# Altium PCB PCB.PcbDoc
Units mm, origin at the board's own origin, x right, y up, seen from the top; angles counter-clockwise.
Board outline 65 x 52 mm, 2 copper layers (Top Layer, Bottom Layer); 12 components, 7 nets, 33 pads, 855 vias.
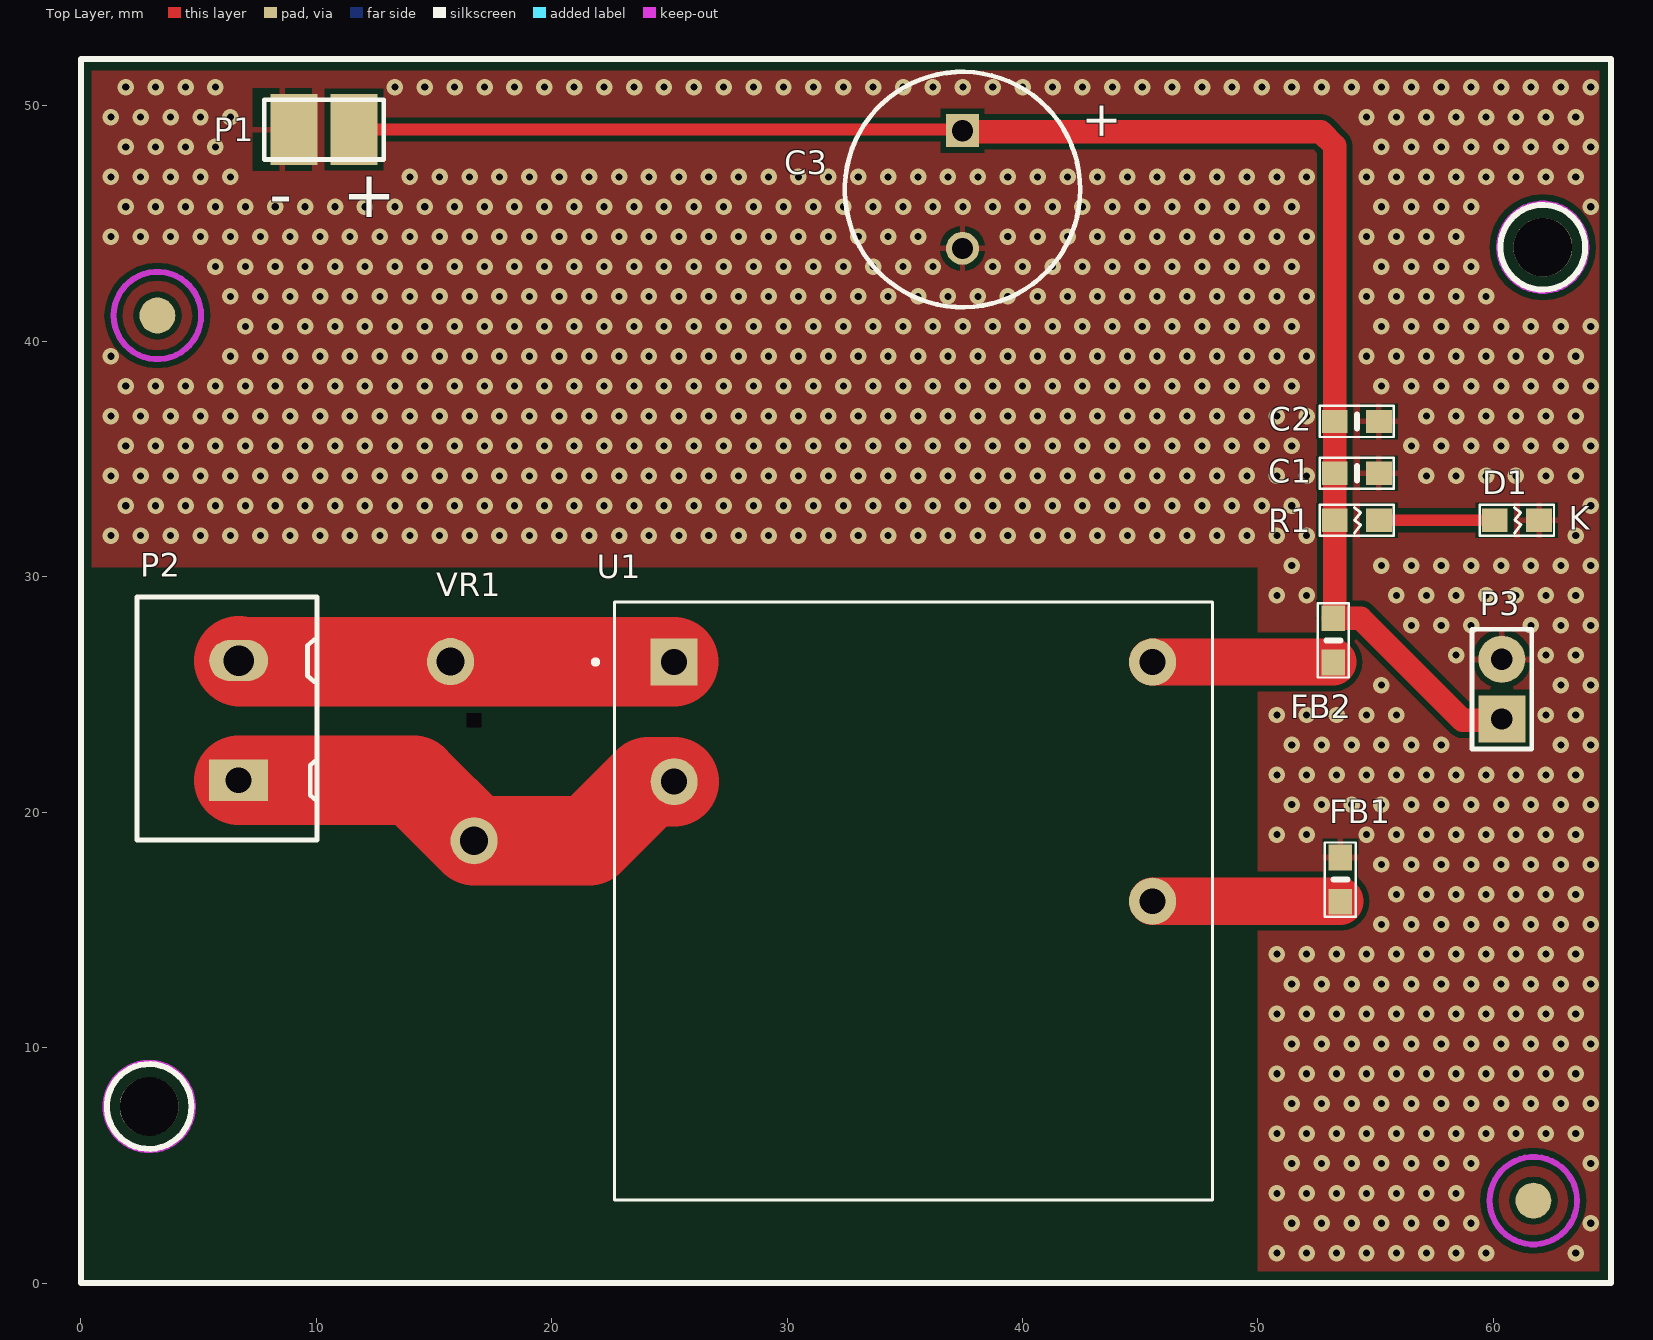
[diagram p0: Top Layer view]
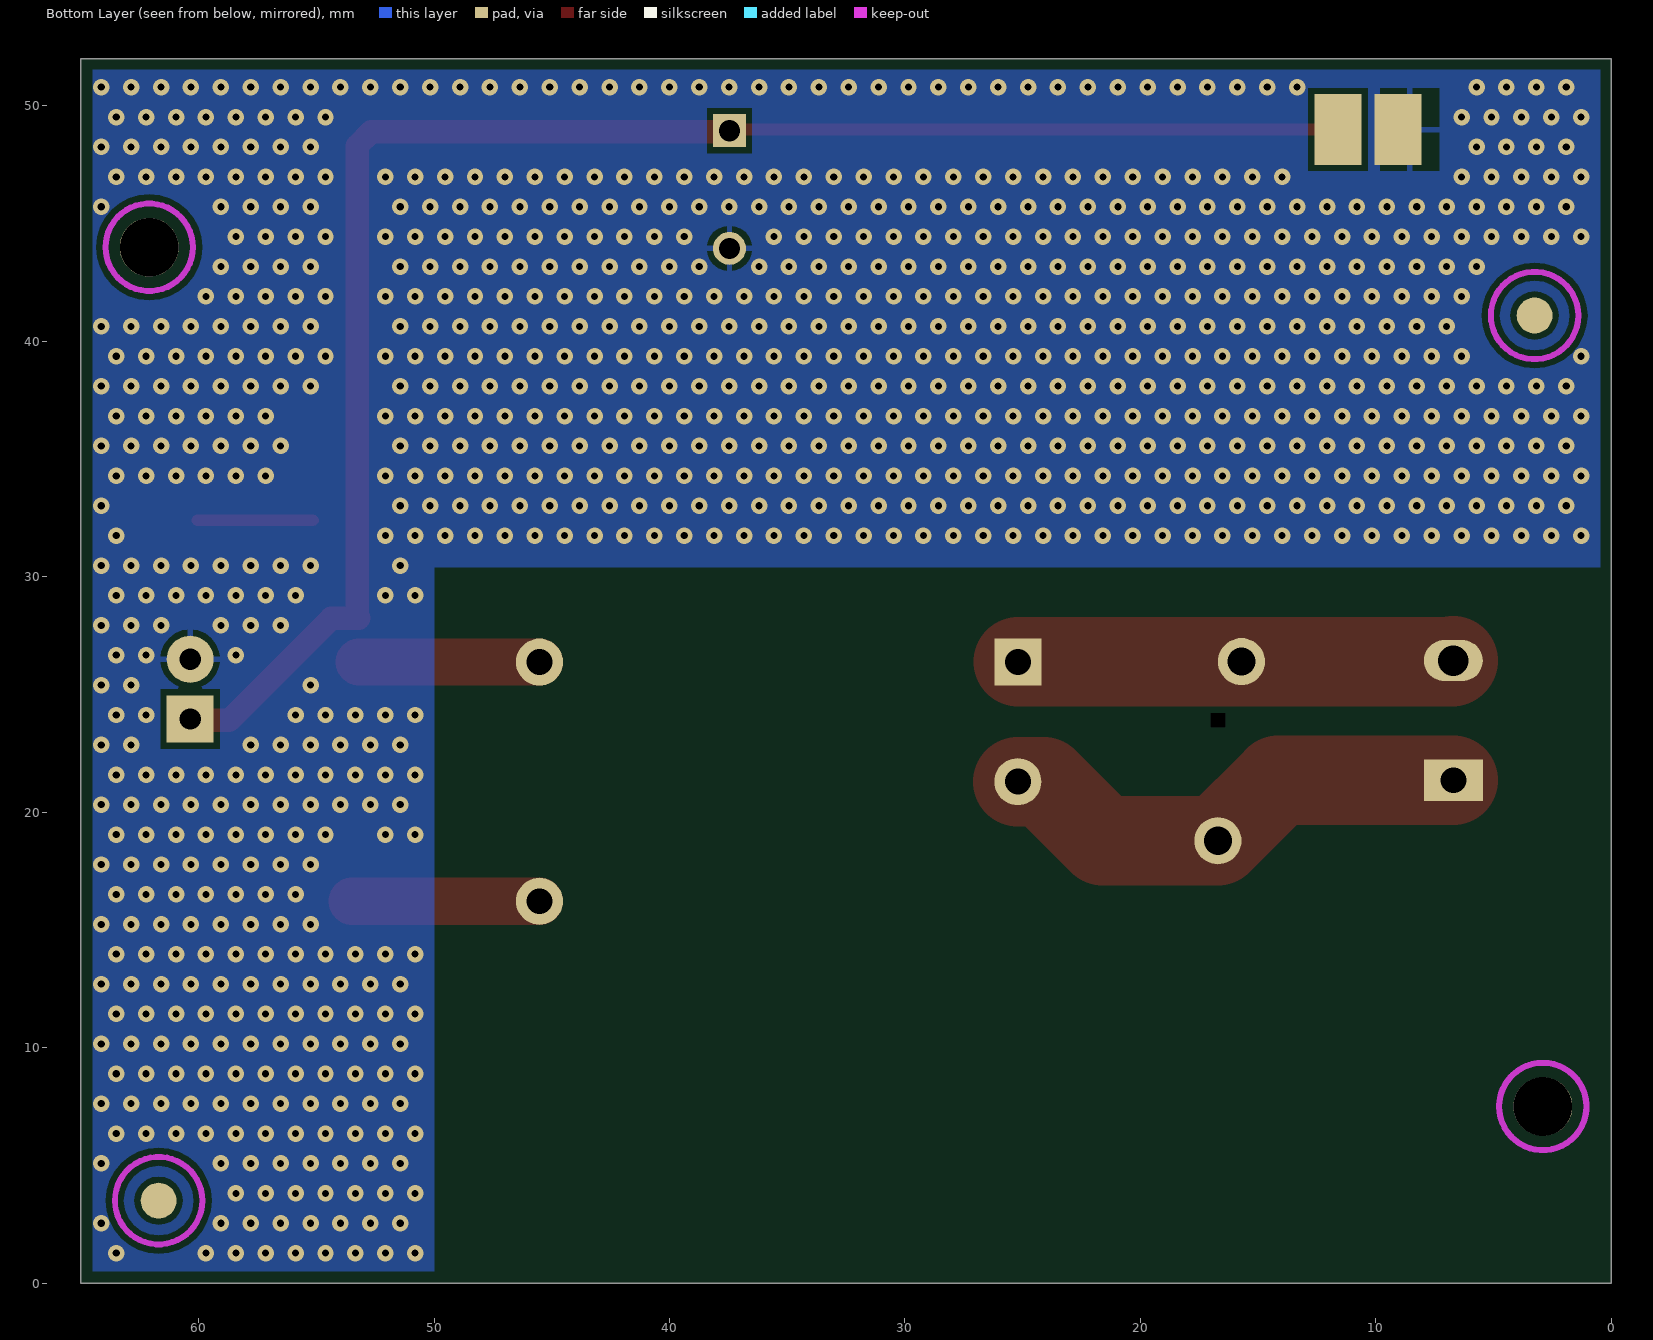
[diagram p1: Bottom Layer view, seen from below]
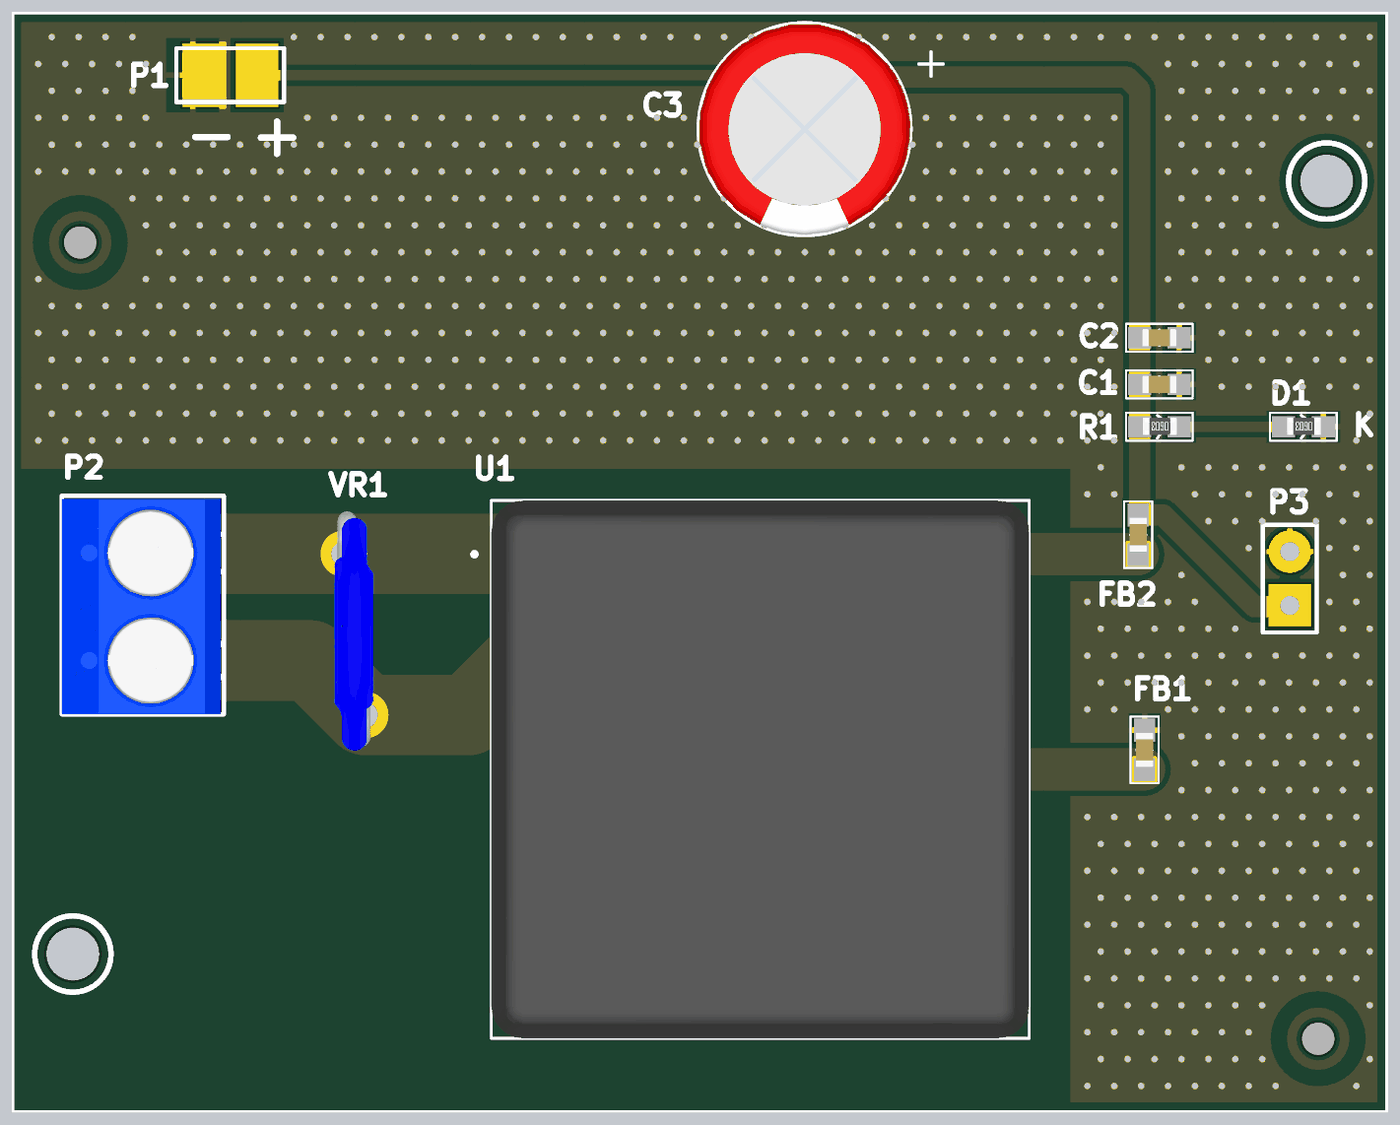
[diagram p2: 3D render of the assembled board from above, using the file's embedded part models]

## Layer stack, top to bottom
Top Solder: solder mask 0.0102, Solder Resist, Dk 3.5
Top Layer: signal copper 0.0356
Dielectric 1: dielectric 0.32, FR-4, Dk 4.8
Bottom Layer: signal copper 0.0356
Bottom Solder: solder mask 0.0102, Solder Resist, Dk 3.5

## Board outline
0,0 0,52 65,52 65,0

## Design rules (kind name [scope] priority, off if disabled: settings)
Clearance [All] p1: gap=0.254 ignorepadtopadclearanceinfootprint=FALSE except(0: Arc-Hole Track-Hole SMDPad-Hole THPad-Hole Via-Hole Fill-Hole Poly-Hole Region-Hole Text-Hole)
PolygonConnect [All] p1: connectstyle=Relief reliefconductorwidth=0.254 reliefentries=4 polygonreliefangle="90 Angle" airgapwidth=0.254
RoutingVias [All] p1: holewidth=0.711 width=1.27 viastyle="Through Hole" minholewidth=0.711 minwidth=1.27 maxholewidth=0.711 maxwidth=1.27
SolderMaskExpansion [All] p1: expansion=0.102 istentingtop=FALSE
Width [All] p1: maxlimit=8 minlimit=0.01 preferedwidth=0.254
30 further rules are at their usual default settings.

## Components (designator, comment, footprint, x,y, rotation, side; value= is the part's Value field where it differs from the comment)
C1 "10µF" "0603 Capacitor" 54.2,34.4 r0 top
C2 "0.1µF" "0603 Capacitor" 54.2,36.6 r0 top
C3 "470UF/DNP" 25ZLH470MEFC10X12.5 37.5,46.4 r90 top
D1 "LED_GREEN" R_0603_W 61,32.4 r0 top
FB1 "FB 1uH" "0603 Capacitor" 53.5,17.14 r90 top
FB2 "FB 1uH" "0603 Capacitor" 53.2,27.3 r90 top
P1 "Header 2" HDR1X2#1 11.6,49 r180 top
P2 "Header 2" "TE 282834-2" 6.7,23.9 r270 top
P3 "Header 2" HDR1X2#2 60.359,23.96 r90 top
R1 "1K" R_0603_W 54.2,32.4 r0 top
U1 "LD05-23B05R2" CONV_LD05-23B03R2 35.36,16.22 r0 top
VR1 "" Mov 16.2,22.6 r90 top value="=Resistance In Ohms @ 25C"

## Footprints (in the part's own frame and the unit in brackets; to place one, negate y for a bottom-side part, rotate by r counter-clockwise, add the part's x,y. Pads: shape width x height; smd on the part's side, far side on the other; paste and mask are expansions set on the pad)
25ZLH470MEFC10X12.5 [mm]
  rect 1.4x1.4 hole 0.9: 1(2.551,0.051)
  round 1.4 hole 0.9: 2(-2.449,0.051)
  silkscreen extent -4.95,-4.95 5.05,5.05, body extent -4.94,-4.95 5.05,5.05, height 12.76
"0603 Capacitor" [mil]
  rect 43x39 smd: 1(-37,0) 2(37,0)
  silkscreen extent -62,-26 62,26, body extent -31,-16 32,16, height 32
CONV_LD05-23B03R2 [mm]
  rect 2x2 hole 1.1: 1(-10.16,10.16)
  round 2 hole 1.1: 2(-10.16,5.08) 3(10.16,10.16) 4(10.16,0)
  silkscreen extent -13.6,-12.7 12.7,12.7, body extent -12.7,-12.7 12.7,12.7, height 17.6
HDR1X2#1 [mm] "Connector; Header; 2 Position"
  rect 2x3 all layers, no hole mask+0.102: 1(0,0)
  rect 2x3 all layers, no hole: 2(2.54,0)
  silkscreen extent -1.27,-1.27 3.81,1.27
HDR1X2#2 [mm] "Connector; Header; 2 Position"
  rect 2x2 hole 0.9: 1(0,0)
  round 2 hole 0.9: 2(2.54,0)
  silkscreen extent -1.27,-1.27 3.81,1.27
Mov [mm]
  round 2 hole 1.2: 1(-3.81,-0.5) 2(3.8,0.5)
  body extent -5.5,-0.9 5.8,0.95, height 18.5
R_0603_W [mil] "Chip Resistor, 2-Leads, Body 1.60x0.80mm, IPC Medium Density"
  rect 43x39 smd: 1(-37,0) 2(37,0)
  silkscreen extent -62,-26 62,26, body extent -30,-15 32,16, height 18
"TE 282834-2" [mm]
  rect 1.75x2.5 hole 1.1: 1(2.54,0)
  oval 1.75x2.5 hole 1.3: 2(-2.54,0)
  silkscreen extent -5.24,-4.32 5.08,3.33, body extent -5.08,-4.33 5.08,3.17, height 10

## Part data
C1: library part CAP_C_10µF/35V, "CAP CER SMD 10µF/35V", MANUFACTURER="Taiyo Yuden", Manufacturer Part Number=GMK316AB7106KL-TR, Operating Temperature="-55°C ~ 125°C", Package / Case="1206 (3216 Metric)", Ratings=-, Supplier Part Number 1=587-3007-1-ND, Temperature Coefficient=X7R, Tolerance=±10%, Voltage - Rated=35V, Applications="General Purpose", Capacitance=10µF, Category=Capacitors, ComponentLink1Description=http://www.yuden.co.jp/productdata/catalog/en/mlcc06_e.pdf, ComponentLink1URL=http://www.yuden.co.jp/productdata/catalog/en/mlcc06_e.pdf, Features=-, Height - Seated (Max)=-, Lead Spacing=-, Lead Style=-, Mounting Type="Surface Mount, MLCC", Packaging="Cut Tape (CT)", Part Status=Active, Pricing 1="1=0.51, 10=0.362, 25=0.3092, 50=0.274, 100=0.2387, 250=0.20328, 500=0.17678, 1000=0.15026 (USD)", ROHS="RoHS Compliant", Size / Dimension="0.126\" L x 0.063\" W (3.20mm x 1.60mm)", Stock 1=533940, Supplier 1=Digi-Key, Thickness (Max)="0.071\" (1.80mm)"
C2: library part CAP_C_0.1µF/50V, "CAP CER SMD 0.1µF/50V", MANUFACTURER=Yageo, Manufacturer Part Number=CC0805ZRY5V9BB104, Operating Temperature="-30°C ~ 85°C", Package / Case="0805 (2012 Metric)", Ratings=-, Supplier Part Number 1=311-1361-1-ND, Temperature Coefficient="Y5V (F)", Tolerance="-20%, +80%", Voltage - Rated=50V, Applications="General Purpose", Capacitance=0.1µF, Category=Capacitors, ComponentLink1Description=http://www.yageo.com/documents/recent/UPY-GPHC_Y5V_6.3V-to-50V_8.pdf, ComponentLink1URL=http://www.yageo.com/documents/recent/UPY-GPHC_Y5V_6.3V-to-50V_8.pdf, Failure Rate=-, Features=-, Height - Seated (Max)=-, Lead Spacing=-, Lead Style=-, Mounting Type="Surface Mount, MLCC", Packaging="Cut Tape (CT)", Part Status=Active, Pricing 1="1=0.1, 10=0.036, 25=0.0264, 50=0.0198, 100=0.0162, 250=0.01352, 500=0.01156, 1000=0.00908 (USD)", ROHS="RoHS Compliant", Size / Dimension="0.079\" L x 0.049\" W (2.00mm x 1.25mm)", Stock 1=934185, Supplier 1=Digi-Key, Thickness (Max)="0.024\" (0.60mm)"
C3: library part CAP, "CAP ALUM 470UF 20% 50V RADIAL", Part Number=P12400-ND
D1: library part LED, "LED GREEN CLEAR THIN 0603 SMD", Distributor Part Number=160-1443-1-ND, Manufacturer Part Number=160-1443-2-ND, PACKAGE=0603, Part Number=160-1443-2-ND, Type=Diode
FB1: library part INDUCTOR, "FILTER CHIP 120 OHM 3A 0603", Distributor Part Number=1276-6357-1-ND, Manufacturer Part Number=490-4004-2-ND, PACKAGE=0603, Part Number=MMZ2012Y152B, Type=Ferrite
FB2: library part INDUCTOR, "FILTER CHIP 120 OHM 3A 0603", Distributor Part Number=1276-6357-1-ND, Manufacturer Part Number=490-4004-2-ND, PACKAGE=0603, Part Number=490-4004-2-ND, Type=Ferrite
P1 P2 P3: "Header, 2-Pin", LatestRevisionDate=17-Jul-2002, LatestRevisionNote="Re-released for DXP Platform.", Publisher="Altium Limited"
R1: library part R, "RES SMD 1K OHM 5% 1/10W 0603", PACKAGE=0603, Part Number=311-1.0KGRTR-ND, Type=Resistor
U1: library part 2_PIN_PSH_BTTN_6, Part Number=MOV-10D431KTRCT-ND
VR1: library part "Metal Oxide Variaster", "SMT Resistor"

## Free pads (board coordinates)
  round 2.5 hole 2.5 unplated: 20(2.9,7.5) 20(62.1,44)
  round 0 hole 0.6 square unplated: 23(16.7,23.9)
  round 1.524 smd: 24(3.25,41.1) 24(61.7,3.5)
  round 1.524 smd far side: 24(3.25,41.1) 24(61.7,3.5)

## Via types
v1: diameter 0.7, hole 0.3, Top Layer to Bottom Layer, tented both sides, 855 vias

## Nets (pads, with @x,y where several pads share a name; then routed paths per layer and width w, separated by ;. In a path a pad name is that pad's centre, name@x,y a point inside that pad or via, vN(x,y) a via of type N, cw(c..) or ccw(c..) an arc to the next point about the centre after c; other vN are vias at no path point)
5VCC: C1.1 C2.1 C3.1 FB2.2 P1.1 P3.1 R1.1 | length 70.9
  Top Layer w0.254: C3.1@37.4,49 C3.1 ; FB2.2 FB2.2@53.26,28.3
  Top Layer w0.5: P1.1 C3.1@37.4,49
  Top Layer w1: C3.1 37.5,48.9 52.674,48.9 53.26,48.314 53.26,36.6 C1.1 R1.1 FB2.2@53.26,28.3 ; FB2.2 54.36,28.24 58.7,23.9 P3.1@60.299,23.9
AC_1: P2.1 U1.2 VR1.1 | length 20.6
  Top Layer w3.8: P2.1 14.13,21.36 VR1.1 21.59,18.79 24.1,21.3 U1.2
AC_2: P2.2 U1.1 VR1.2 | length 18.5
  Top Layer w0.254: U1.1@25.18,26.4 U1.1
  Top Layer w3.8: P2.2 6.74,26.4 U1.1@25.18,26.4
GND_POWER: C1.2 C2.2 C3.2 D1.2 FB1.2 P1.2 P3.2
  other v1: 50.8,1.27 52.07,1.27 53.34,1.27 54.61,1.27 55.88,1.27 57.15,1.27 58.42,1.27 59.69,1.27 63.5,1.27 51.435,2.54 52.705,2.54 53.975,2.54 55.245,2.54 56.515,2.54 57.785,2.54 59.055,2.54 64.135,2.54 50.8,3.81 52.07,3.81 53.34,3.81 54.61,3.81 55.88,3.81 57.15,3.81 58.42,3.81 51.435,5.08 52.705,5.08 53.975,5.08 55.245,5.08 56.515,5.08 57.785,5.08 59.055,5.08 64.135,5.08 50.8,6.35 52.07,6.35 53.34,6.35 54.61,6.35 55.88,6.35 57.15,6.35 58.42,6.35 59.69,6.35 60.96,6.35 62.23,6.35 63.5,6.35 51.435,7.62 52.705,7.62 53.975,7.62 55.245,7.62 56.515,7.62 57.785,7.62 59.055,7.62 60.325,7.62 61.595,7.62 62.865,7.62 64.135,7.62 50.8,8.89 52.07,8.89 53.34,8.89 54.61,8.89 55.88,8.89 57.15,8.89 58.42,8.89 59.69,8.89 60.96,8.89 62.23,8.89 63.5,8.89 51.435,10.16 52.705,10.16 53.975,10.16 55.245,10.16 56.515,10.16 57.785,10.16 59.055,10.16 60.325,10.16 61.595,10.16 62.865,10.16 64.135,10.16 50.8,11.43 52.07,11.43 53.34,11.43 54.61,11.43 55.88,11.43 57.15,11.43 58.42,11.43 59.69,11.43 60.96,11.43 62.23,11.43 63.5,11.43 51.435,12.7 52.705,12.7 53.975,12.7 55.245,12.7 56.515,12.7 57.785,12.7 59.055,12.7 60.325,12.7 61.595,12.7 62.865,12.7 64.135,12.7 50.8,13.97 52.07,13.97 53.34,13.97 54.61,13.97 55.88,13.97 57.15,13.97 58.42,13.97 59.69,13.97 60.96,13.97 62.23,13.97 63.5,13.97 55.245,15.24 56.515,15.24 57.785,15.24 59.055,15.24 60.325,15.24 61.595,15.24 62.865,15.24 64.135,15.24 55.88,16.51 57.15,16.51 58.42,16.51 59.69,16.51 60.96,16.51 62.23,16.51 63.5,16.51 55.245,17.78 56.515,17.78 57.785,17.78 59.055,17.78 60.325,17.78 61.595,17.78 62.865,17.78 64.135,17.78 50.8,19.05 52.07,19.05 54.61,19.05 55.88,19.05 57.15,19.05 58.42,19.05 59.69,19.05 60.96,19.05 62.23,19.05 63.5,19.05 51.435,20.32 52.705,20.32 53.975,20.32 55.245,20.32 56.515,20.32 57.785,20.32 59.055,20.32 60.325,20.32 61.595,20.32 62.865,20.32 64.135,20.32 50.8,21.59 52.07,21.59 53.34,21.59 54.61,21.59 55.88,21.59 57.15,21.59 58.42,21.59 59.69,21.59 60.96,21.59 62.23,21.59 63.5,21.59 51.435,22.86 52.705,22.86 53.975,22.86 55.245,22.86 56.515,22.86 57.785,22.86 62.865,22.86 64.135,22.86 50.8,24.13 52.07,24.13 53.34,24.13 54.61,24.13 55.88,24.13 62.23,24.13 63.5,24.13 55.245,25.4 62.865,25.4 64.135,25.4 58.42,26.67 62.23,26.67 63.5,26.67 56.515,27.94 57.785,27.94 59.055,27.94 61.595,27.94 62.865,27.94 64.135,27.94 50.8,29.21 52.07,29.21 55.88,29.21 57.15,29.21 58.42,29.21 59.69,29.21 60.96,29.21 62.23,29.21 63.5,29.21 51.435,30.48 55.245,30.48 56.515,30.48 57.785,30.48 59.055,30.48 60.325,30.48 61.595,30.48 62.865,30.48 64.135,30.48 1.27,31.75 2.54,31.75 3.81,31.75 5.08,31.75 6.35,31.75 7.62,31.75 8.89,31.75 10.16,31.75 11.43,31.75 12.7,31.75 13.97,31.75 15.24,31.75 16.51,31.75 17.78,31.75 19.05,31.75 20.32,31.75 21.59,31.75 22.86,31.75 24.13,31.75 25.4,31.75 26.67,31.75 27.94,31.75 29.21,31.75 30.48,31.75 31.75,31.75 33.02,31.75 34.29,31.75 35.56,31.75 36.83,31.75 38.1,31.75 39.37,31.75 40.64,31.75 41.91,31.75 43.18,31.75 44.45,31.75 45.72,31.75 46.99,31.75 48.26,31.75 49.53,31.75 50.8,31.75 52.07,31.75 63.5,31.75 1.905,33.02 3.175,33.02 4.445,33.02 5.715,33.02 6.985,33.02 8.255,33.02 9.525,33.02 10.795,33.02 12.065,33.02 13.335,33.02 14.605,33.02 15.875,33.02 17.145,33.02 18.415,33.02 19.685,33.02 20.955,33.02 22.225,33.02 23.495,33.02 24.765,33.02 26.035,33.02 27.305,33.02 28.575,33.02 29.845,33.02 31.115,33.02 32.385,33.02 33.655,33.02 34.925,33.02 36.195,33.02 37.465,33.02 38.735,33.02 40.005,33.02 41.275,33.02 42.545,33.02 43.815,33.02 45.085,33.02 46.355,33.02 47.625,33.02 48.895,33.02 50.165,33.02 51.435,33.02 64.135,33.02 1.27,34.29 2.54,34.29 3.81,34.29 5.08,34.29 6.35,34.29 7.62,34.29 8.89,34.29 10.16,34.29 11.43,34.29 12.7,34.29 13.97,34.29 15.24,34.29 16.51,34.29 17.78,34.29 19.05,34.29 20.32,34.29 21.59,34.29 22.86,34.29 24.13,34.29 25.4,34.29 26.67,34.29 27.94,34.29 29.21,34.29 30.48,34.29 31.75,34.29 33.02,34.29 34.29,34.29 35.56,34.29 36.83,34.29 38.1,34.29 39.37,34.29 40.64,34.29 41.91,34.29 43.18,34.29 44.45,34.29 45.72,34.29 46.99,34.29 48.26,34.29 49.53,34.29 50.8,34.29 52.07,34.29 57.15,34.29 58.42,34.29 59.69,34.29 60.96,34.29 62.23,34.29 63.5,34.29 1.905,35.56 3.175,35.56 4.445,35.56 5.715,35.56 6.985,35.56 8.255,35.56 9.525,35.56 10.795,35.56 12.065,35.56 13.335,35.56 14.605,35.56 15.875,35.56 17.145,35.56 18.415,35.56 19.685,35.56 20.955,35.56 22.225,35.56 23.495,35.56 24.765,35.56 26.035,35.56 27.305,35.56 28.575,35.56 29.845,35.56 31.115,35.56 32.385,35.56 33.655,35.56 34.925,35.56 36.195,35.56 37.465,35.56 38.735,35.56 40.005,35.56 41.275,35.56 42.545,35.56 43.815,35.56 45.085,35.56 46.355,35.56 47.625,35.56 48.895,35.56 50.165,35.56 51.435,35.56 56.515,35.56 57.785,35.56 59.055,35.56 60.325,35.56 61.595,35.56 62.865,35.56 64.135,35.56 1.27,36.83 2.54,36.83 3.81,36.83 5.08,36.83 6.35,36.83 7.62,36.83 8.89,36.83 10.16,36.83 11.43,36.83 12.7,36.83 13.97,36.83 15.24,36.83 16.51,36.83 17.78,36.83 19.05,36.83 20.32,36.83 21.59,36.83 22.86,36.83 24.13,36.83 25.4,36.83 26.67,36.83 27.94,36.83 29.21,36.83 30.48,36.83 31.75,36.83 33.02,36.83 34.29,36.83 35.56,36.83 36.83,36.83 38.1,36.83 39.37,36.83 40.64,36.83 41.91,36.83 43.18,36.83 44.45,36.83 45.72,36.83 46.99,36.83 48.26,36.83 49.53,36.83 50.8,36.83 52.07,36.83 57.15,36.83 58.42,36.83 59.69,36.83 60.96,36.83 62.23,36.83 63.5,36.83 1.905,38.1 3.175,38.1 4.445,38.1 5.715,38.1 6.985,38.1 8.255,38.1 9.525,38.1 10.795,38.1 12.065,38.1 13.335,38.1 14.605,38.1 15.875,38.1 17.145,38.1 18.415,38.1 19.685,38.1 20.955,38.1 22.225,38.1 23.495,38.1 24.765,38.1 26.035,38.1 27.305,38.1 28.575,38.1 29.845,38.1 31.115,38.1 32.385,38.1 33.655,38.1 34.925,38.1 36.195,38.1 37.465,38.1 38.735,38.1 40.005,38.1 41.275,38.1 42.545,38.1 43.815,38.1 45.085,38.1 46.355,38.1 47.625,38.1 48.895,38.1 50.165,38.1 51.435,38.1 55.245,38.1 56.515,38.1 57.785,38.1 59.055,38.1 60.325,38.1 61.595,38.1 62.865,38.1 64.135,38.1 1.27,39.37 6.35,39.37 7.62,39.37 8.89,39.37 10.16,39.37 11.43,39.37 12.7,39.37 13.97,39.37 15.24,39.37 16.51,39.37 17.78,39.37 19.05,39.37 20.32,39.37 21.59,39.37 22.86,39.37 24.13,39.37 25.4,39.37 26.67,39.37 27.94,39.37 29.21,39.37 30.48,39.37 31.75,39.37 33.02,39.37 34.29,39.37 35.56,39.37 36.83,39.37 38.1,39.37 39.37,39.37 40.64,39.37 41.91,39.37 43.18,39.37 44.45,39.37 45.72,39.37 46.99,39.37 48.26,39.37 49.53,39.37 50.8,39.37 52.07,39.37 54.61,39.37 55.88,39.37 57.15,39.37 58.42,39.37 59.69,39.37 60.96,39.37 62.23,39.37 63.5,39.37 6.985,40.64 8.255,40.64 9.525,40.64 10.795,40.64 12.065,40.64 13.335,40.64 14.605,40.64 15.875,40.64 17.145,40.64 18.415,40.64 19.685,40.64 20.955,40.64 22.225,40.64 23.495,40.64 24.765,40.64 26.035,40.64 27.305,40.64 28.575,40.64 29.845,40.64 31.115,40.64 32.385,40.64 33.655,40.64 34.925,40.64 36.195,40.64 37.465,40.64 38.735,40.64 40.005,40.64 41.275,40.64 42.545,40.64 43.815,40.64 45.085,40.64 46.355,40.64 47.625,40.64 48.895,40.64 50.165,40.64 51.435,40.64 55.245,40.64 56.515,40.64 57.785,40.64 59.055,40.64 60.325,40.64 61.595,40.64 62.865,40.64 64.135,40.64 6.35,41.91 7.62,41.91 8.89,41.91 10.16,41.91 11.43,41.91 12.7,41.91 13.97,41.91 15.24,41.91 16.51,41.91 17.78,41.91 19.05,41.91 20.32,41.91 21.59,41.91 22.86,41.91 24.13,41.91 25.4,41.91 26.67,41.91 27.94,41.91 29.21,41.91 30.48,41.91 31.75,41.91 33.02,41.91 34.29,41.91 35.56,41.91 36.83,41.91 38.1,41.91 39.37,41.91 40.64,41.91 41.91,41.91 43.18,41.91 44.45,41.91 45.72,41.91 46.99,41.91 48.26,41.91 49.53,41.91 50.8,41.91 52.07,41.91 54.61,41.91 55.88,41.91 57.15,41.91 58.42,41.91 59.69,41.91 5.715,43.18 6.985,43.18 8.255,43.18 9.525,43.18 10.795,43.18 12.065,43.18 13.335,43.18 14.605,43.18 15.875,43.18 17.145,43.18 18.415,43.18 19.685,43.18 20.955,43.18 22.225,43.18 23.495,43.18 24.765,43.18 26.035,43.18 27.305,43.18 28.575,43.18 29.845,43.18 31.115,43.18 32.385,43.18 33.655,43.18 34.925,43.18 36.195,43.18 38.735,43.18 40.005,43.18 41.275,43.18 42.545,43.18 43.815,43.18 45.085,43.18 46.355,43.18 47.625,43.18 48.895,43.18 50.165,43.18 51.435,43.18 55.245,43.18 56.515,43.18 57.785,43.18 59.055,43.18 1.27,44.45 2.54,44.45 3.81,44.45 5.08,44.45 6.35,44.45 7.62,44.45 8.89,44.45 10.16,44.45 11.43,44.45 12.7,44.45 13.97,44.45 15.24,44.45 16.51,44.45 17.78,44.45 19.05,44.45 20.32,44.45 21.59,44.45 22.86,44.45 24.13,44.45 25.4,44.45 26.67,44.45 27.94,44.45 29.21,44.45 30.48,44.45 31.75,44.45 33.02,44.45 34.29,44.45 35.56,44.45 39.37,44.45 40.64,44.45 41.91,44.45 43.18,44.45 44.45,44.45 45.72,44.45 46.99,44.45 48.26,44.45 49.53,44.45 50.8,44.45 52.07,44.45 54.61,44.45 55.88,44.45 57.15,44.45 58.42,44.45 1.905,45.72 3.175,45.72 4.445,45.72 5.715,45.72 6.985,45.72 8.255,45.72 9.525,45.72 10.795,45.72 12.065,45.72 13.335,45.72 14.605,45.72 15.875,45.72 17.145,45.72 18.415,45.72 19.685,45.72 20.955,45.72 22.225,45.72 23.495,45.72 24.765,45.72 26.035,45.72 27.305,45.72 28.575,45.72 29.845,45.72 31.115,45.72 32.385,45.72 33.655,45.72 34.925,45.72 36.195,45.72 37.465,45.72 38.735,45.72 40.005,45.72 41.275,45.72 42.545,45.72 43.815,45.72 45.085,45.72 46.355,45.72 47.625,45.72 48.895,45.72 50.165,45.72 51.435,45.72 55.245,45.72 56.515,45.72 57.785,45.72 59.055,45.72 64.135,45.72 1.27,46.99 2.54,46.99 3.81,46.99 5.08,46.99 6.35,46.99 13.97,46.99 15.24,46.99 16.51,46.99 17.78,46.99 19.05,46.99 20.32,46.99 21.59,46.99 22.86,46.99 24.13,46.99 25.4,46.99 26.67,46.99 27.94,46.99 29.21,46.99 30.48,46.99 31.75,46.99 33.02,46.99 34.29,46.99 35.56,46.99 36.83,46.99 38.1,46.99 39.37,46.99 40.64,46.99 41.91,46.99 43.18,46.99 44.45,46.99 45.72,46.99 46.99,46.99 48.26,46.99 49.53,46.99 50.8,46.99 52.07,46.99 54.61,46.99 55.88,46.99 57.15,46.99 58.42,46.99 59.69,46.99 60.96,46.99 62.23,46.99 63.5,46.99 1.905,48.26 3.175,48.26 4.445,48.26 5.715,48.26 55.245,48.26 56.515,48.26 57.785,48.26 59.055,48.26 60.325,48.26 61.595,48.26 62.865,48.26 64.135,48.26 1.27,49.53 2.54,49.53 3.81,49.53 5.08,49.53 6.35,49.53 54.61,49.53 55.88,49.53 57.15,49.53 58.42,49.53 59.69,49.53 60.96,49.53 62.23,49.53 63.5,49.53 1.905,50.8 3.175,50.8 4.445,50.8 5.715,50.8 13.335,50.8 14.605,50.8 15.875,50.8 17.145,50.8 18.415,50.8 19.685,50.8 20.955,50.8 22.225,50.8 23.495,50.8 24.765,50.8 26.035,50.8 27.305,50.8 28.575,50.8 29.845,50.8 31.115,50.8 32.385,50.8 33.655,50.8 34.925,50.8 36.195,50.8 37.465,50.8 38.735,50.8 40.005,50.8 41.275,50.8 42.545,50.8 43.815,50.8 45.085,50.8 46.355,50.8 47.625,50.8 48.895,50.8 50.165,50.8 51.435,50.8 52.705,50.8 53.975,50.8 55.245,50.8 56.515,50.8 57.785,50.8 59.055,50.8 60.325,50.8 61.595,50.8 62.865,50.8 64.135,50.8
NetD1_1: D1.1 R1.2 | length 4.9
  Top Layer w0.5: R1.2 D1.1
NetFB1_1: FB1.1 U1.4 | length 8
  Top Layer w0.254: FB1.1@53.48,16.22 FB1.1
  Top Layer w2: U1.4 FB1.1@53.48,16.22
NetFB2_1: FB2.1 U1.3 | length 7.7
  Top Layer w0.254: FB2.1@53.18,26.38 FB2.1
  Top Layer w2: U1.3 FB2.1@53.18,26.38

## Polygon pours and split planes (outlines as drawn)
GND_POWER on Top Layer "Top Layer-GND_POWER" (solid, pour order 0): 0.45,51.5 64.5,51.5 64.5,0.5 50,0.5 50,30.4 0.45,30.4
GND_POWER on Bottom Layer "Bottom Layer-GND_POWER" (solid, pour order 1): 50,0.5 64.5,0.5 64.5,51.55 0.45,51.55 0.45,30.4 50,30.4

## Keep-outs
Keep-Out Layer:
  circle w0.254: c3.25,41.1 r1.856
  circle w0.254: c3.25,41.1 r1.856
  circle w0.254: c2.9,7.5 r1.856
  circle w0.254: c62.1,44 r1.856
  circle w0.254: c62.1,44 r1.856
  circle w0.254: c61.7,3.5 r1.856
  circle w0.254: c61.7,3.5 r1.856
  lines w0.254: 4.755,7.582 ccw(c2.9,7.5) 4.756,7.5

## Silkscreen, mask and mechanical layers (free items; w line width, h text height)
Top Overlay:
  circle w0.254: c2.9,7.5 r1.8
  circle w0.254: c62.1,44 r1.8
  lines w0.254: 0,0 0,52 65,52 65,0 0,0
  text "-" at 8.005,45.305 h2
  text "+" at 11.105,45.272 h2
  text "K" at 63.204,32.004 h1
Mechanical 1:
  the board outline again, w0.5

## Text inside footprints (layer, text, board x,y; h text height)
C3: Top Overlay "+" at 44,48.5 h1.5 r90